# Allegro board gate_driver_ttype_modified_v1_11mar.brd
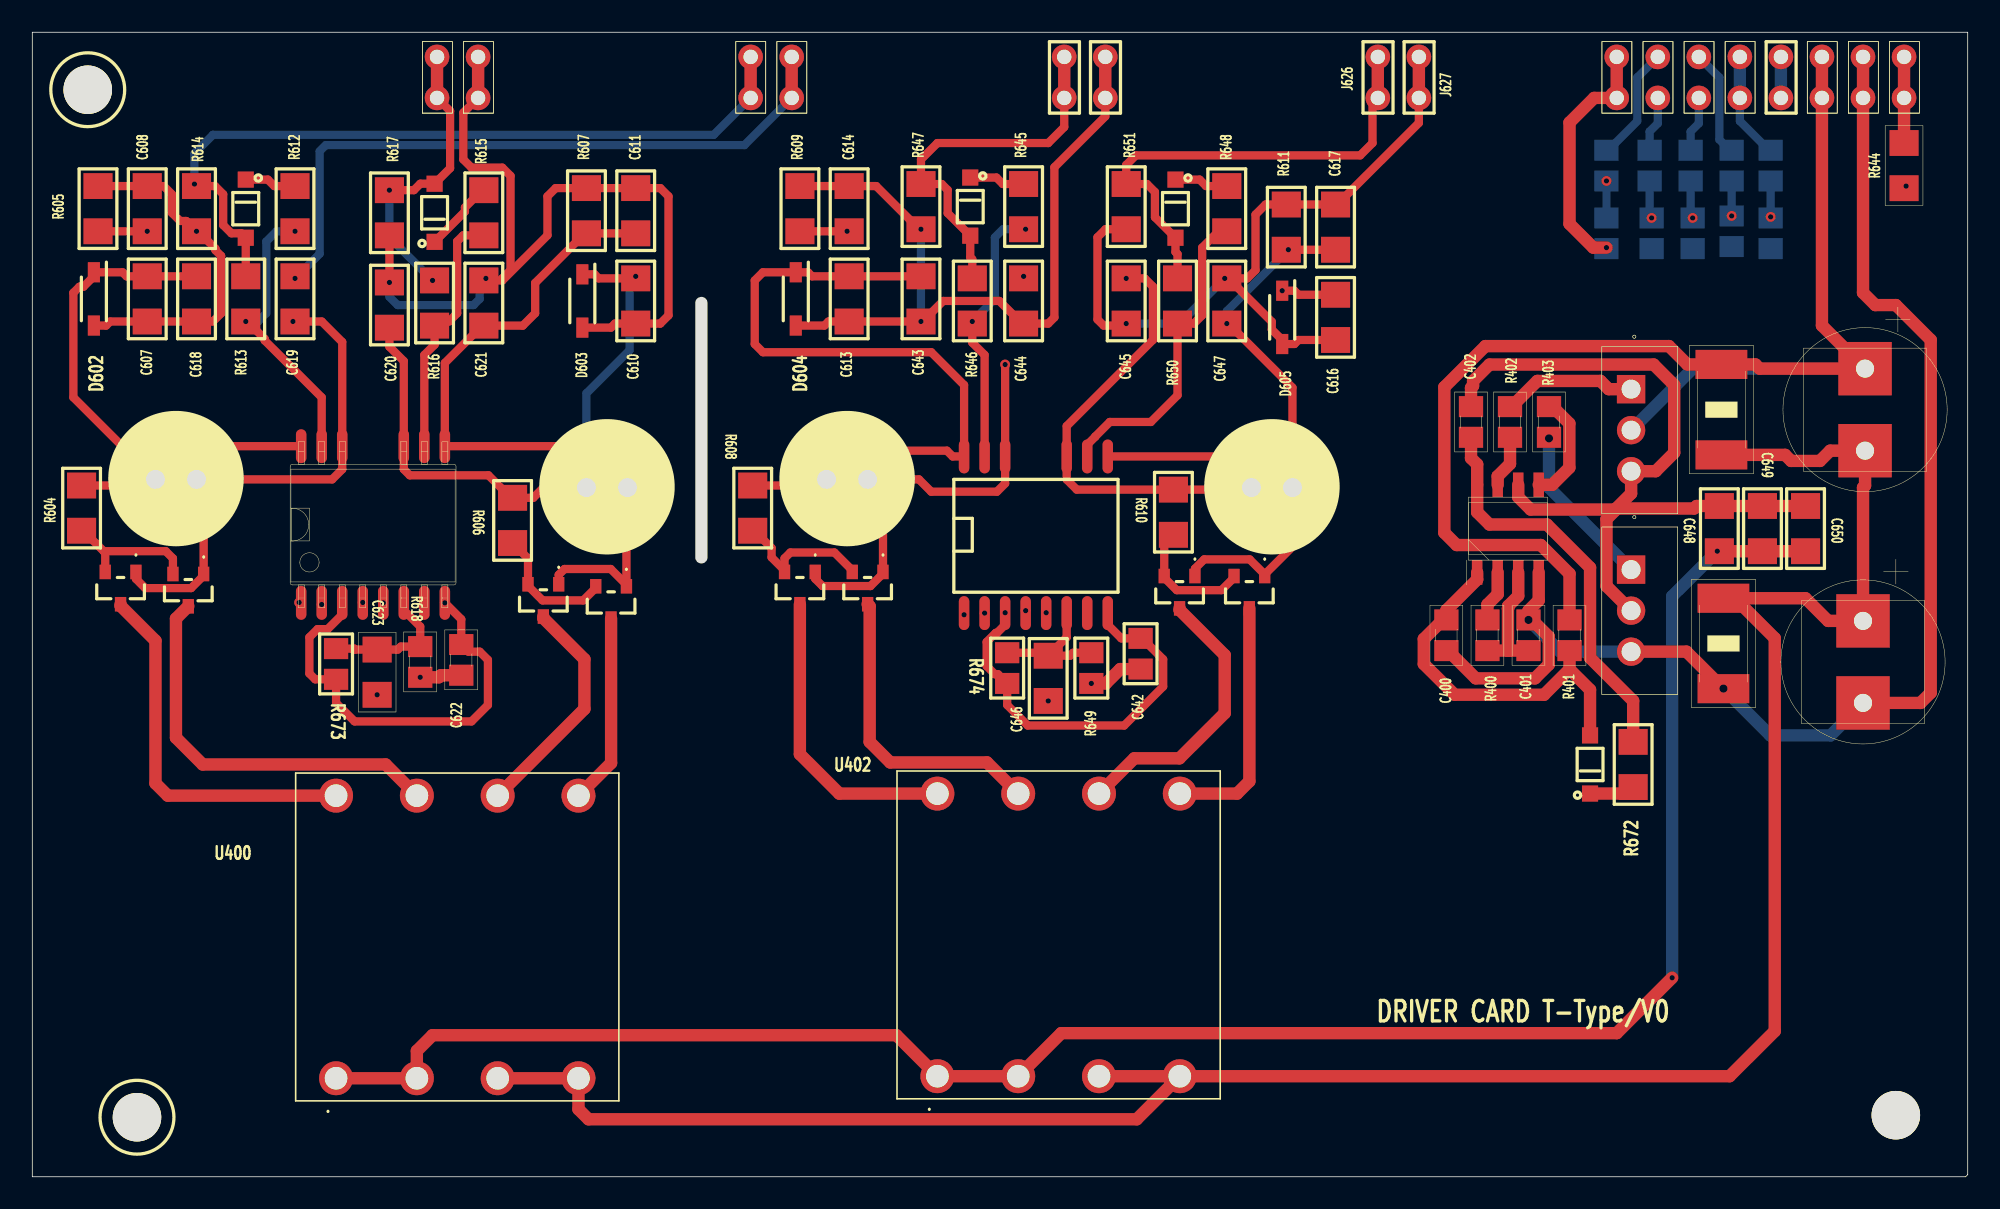
[diagram p0: board, top side]
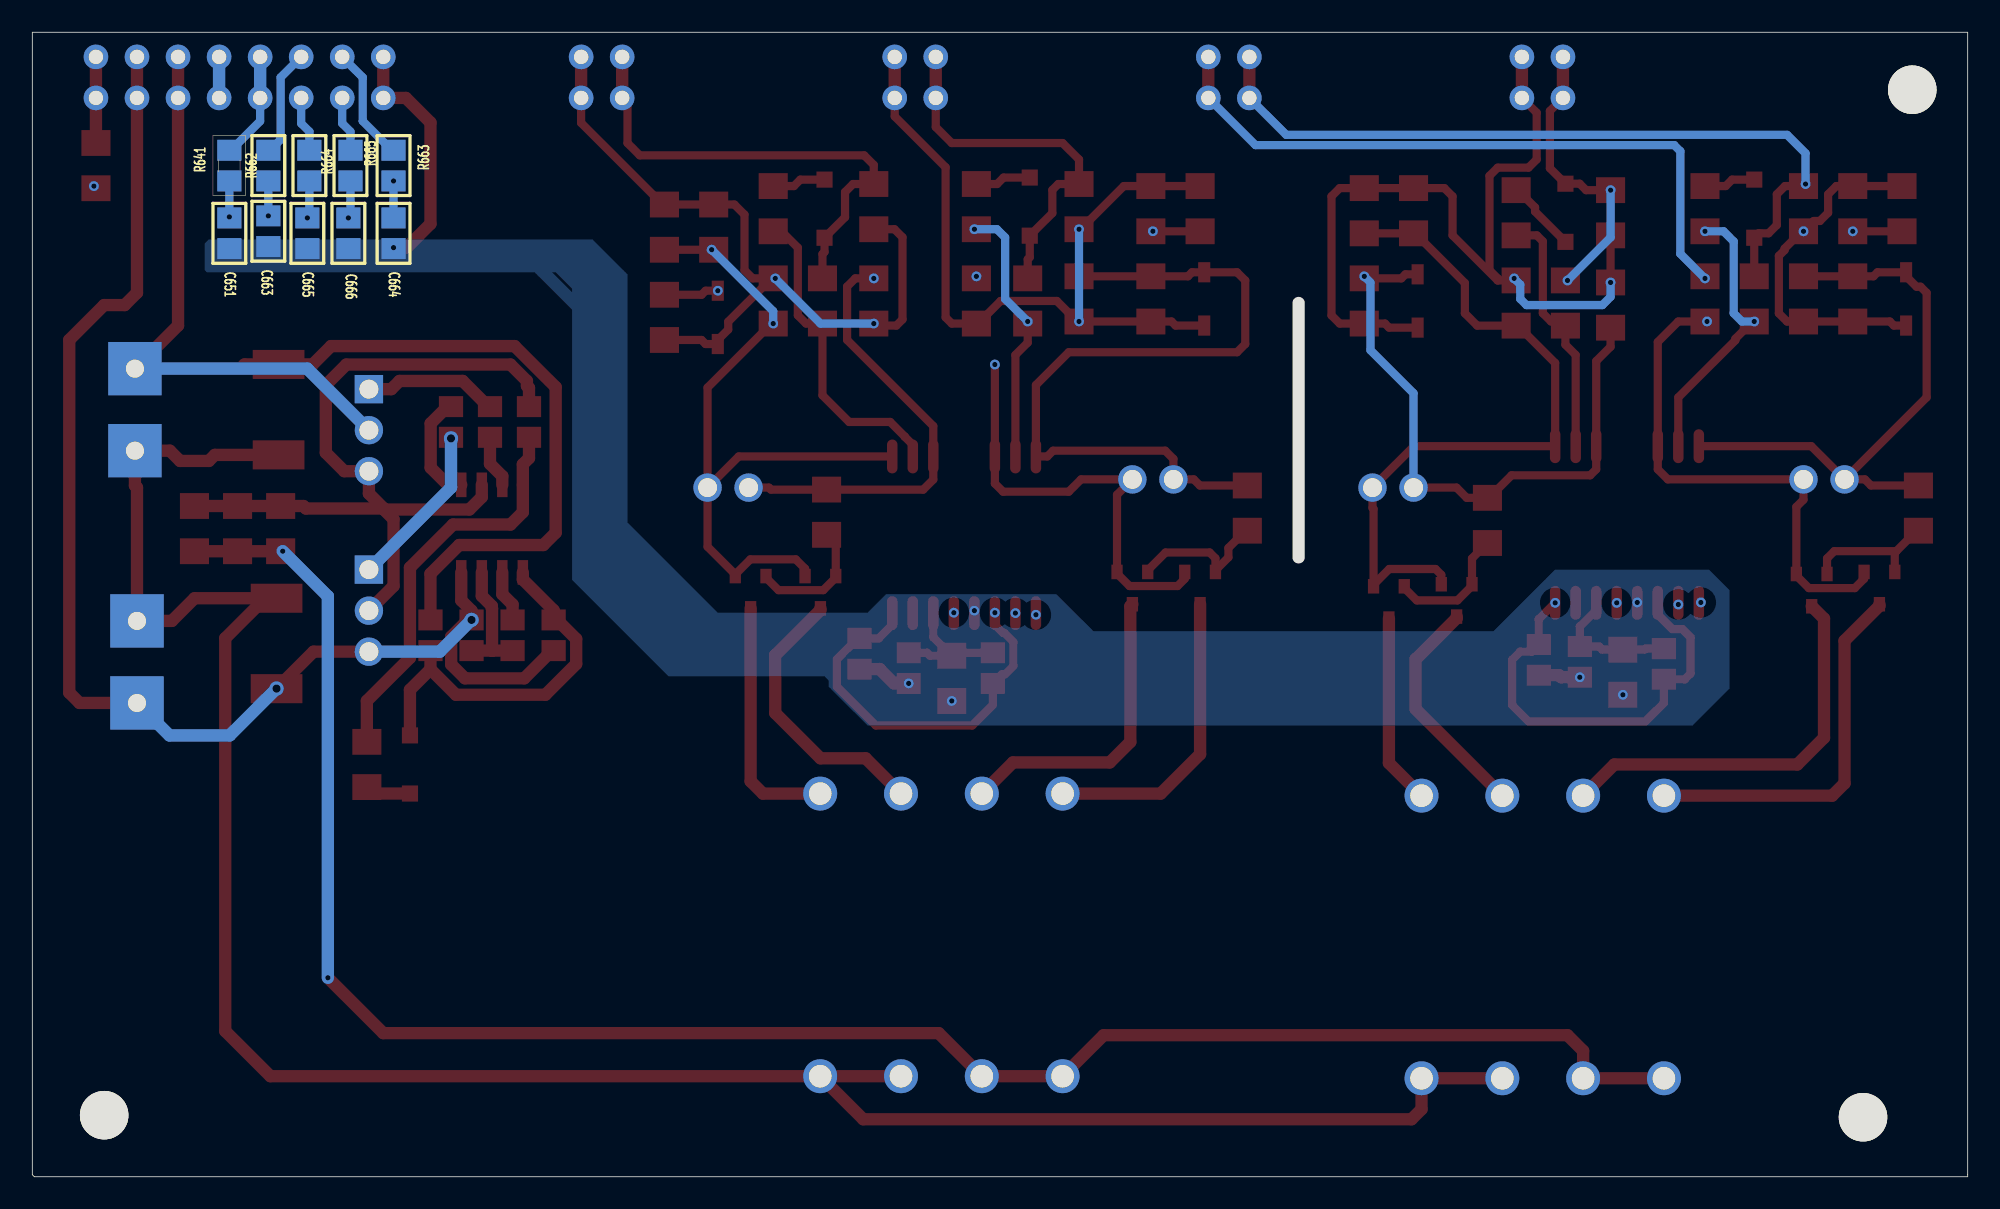
[diagram p1: board, bottom side, seen from below]

Outline 119.76 x 70.87 mm; copper layers: TOP, LAYER_1, LAYER_2, BOTTOM. Coordinates in mm from the lower left corner of the outline.
Outline path: 41.4,38.35 41.4,54.1 ; 0,70.87 0,0 119.63,0 119.76,0.13 119.76,70.87 0,70.87

## Design rules (mm)
constraint set DEFAULT: min track width 0.127

## Placement (name value [footprint] x y rotation side)
C400  0.1u 0805 50V  [SNPD0805_MODIFIED]  87.5 33.53 270 top
C401  10nF 0805 50V  [SNPD0805_MODIFIED]  92.58 33.53 90 top
C402  0.1u 0805 50V  [SNPD0805_MODIFIED]  89.03 46.74 90 top
C404  470u 35/50V  [CAP_SMD_PTH_470UF50V]  113.41 50.04 270 top
C405  470u 35/50V  [CAP_SMD_PTH_470UF50V]  113.28 34.42 270 top
C606  100 uF electrolytic  [220UF_35V]  7.62 43.18 0 top
C607  10u 1206 50V  [SNPD1206_MODIFIED]  7.11 54.36 90 top
C608  10u 1206 50V  [SNPD1206_MODIFIED]  7.11 59.94 90 top
C609  100 uF electrolytic  [220UF_35V]  34.29 42.67 0 top
C610  10u 1206 50V  [SNPD1206_MODIFIED]  37.34 54.23 90 top
C611  10u 1206 50V  [SNPD1206_MODIFIED]  37.34 59.82 90 top
C612  100 uF electrolytic  [220UF_35V]  49.15 43.18 0 top
C613  10u 1206 50V  [SNPD1206_MODIFIED]  50.55 54.36 90 top
C614  10u 1206 50V  [SNPD1206_MODIFIED]  50.55 59.94 90 top
C615  100 uF electrolytic  [220UF_35V]  75.44 42.67 0 top
C616  22u 1206 50V  [SNPD1206_MODIFIED]  80.64 53.21 90 top
C617  22u 1206 50V  [SNPD1206_MODIFIED]  80.64 58.8 90 top
C618  0.1u 1206 50V  [SNPD1206_MODIFIED]  10.16 54.36 270 top
C619  0.1u 1206 50V  [SNPD1206_MODIFIED]  16.26 54.36 270 top
C620  0.1u 1206 50V  [SNPD1206_MODIFIED]  22.1 53.97 90 top
C621  0.1u 1206 50V  [SNPD1206_MODIFIED]  27.94 54.1 270 top
C622  0.1u 0805 50V  [SNPD0805_MODIFIED]  26.54 32 270 top
C623  2.2nF 1206 50V  [SNPD1206_MODIFIED]  21.34 31.24 90 top
C642  0.1u 0805 50V  [SNPD0805_MODIFIED]  68.58 32.38 270 top
C643  0.1u 1206 50V  [SNPD1206_MODIFIED]  54.99 54.36 270 top
C644  0.1u 1206 50V  [SNPD1206_MODIFIED]  61.34 54.23 90 top
C645  0.1u 1206 50V  [SNPD1206_MODIFIED]  67.69 54.23 270 top
C646  2.2nF 1206 50V  [SNPD1206_MODIFIED]  62.86 30.86 90 top
C647  0.1u 1206 50V  [SNPD1206_MODIFIED]  73.91 54.23 270 top
C648  1u 1206 50V  [SNPD1206_MODIFIED]  104.39 40.13 270 top
C649  1u 1206 50V  [SNPD1206_MODIFIED]  107.06 40.13 270 top
C650  1u 1206 50V  [SNPD1206_MODIFIED]  109.73 40.13 270 top
C651  0.1u 0805 50V  [SNPD0805_MODIFIED]  107.57 58.42 270 bottom
C663  0.1u 0805 50V  [SNPD0805_MODIFIED]  105.16 58.55 270 bottom
C664  0.1u 0805 50V  [SNPD0805_MODIFIED]  97.41 58.42 270 bottom
C665  0.1u 0805 50V  [SNPD0805_MODIFIED]  102.74 58.42 270 bottom
C666  0.1u 0805 50V  [SNPD0805_MODIFIED]  100.2 58.42 270 bottom
D408  -  [BAV99]  35.81 35.56 180 top
D409  -  [BAV99]  31.62 35.69 180 top
D602  BZT52B12-E3-18_SOD123_2.4V  [SOD3716X135N]  3.81 54.36 270 top
D603  BZT52B12-E3-18_SOD123_2.4V  [SOD3716X135N]  34.04 54.23 270 top
D604  BZT52B12-E3-18_SOD123_2.4V  [SOD3716X135N]  47.24 54.36 270 top
D605  BZT52B12-E3-18_SOD123_2.4V  [SOD3716X135N]  77.34 53.21 270 top
D606  1N4148 SMD  [DO214]  13.21 59.94 270 top
D607  1N4148 SMD  [DO214]  24.89 59.69 90 top
D614  1N4148 SMD  [DO214]  58.04 60.07 270 top
D615  1N4148 SMD  [DO214]  70.74 59.94 270 top
D616  -  [BAV99]  9.65 36.32 180 top
D617  -  [BAV99]  5.46 36.45 180 top
D618  -  [BAV99]  75.31 36.2 180 top
D619  -  [BAV99]  70.99 36.2 180 top
D620  -  [BAV99]  51.69 36.45 180 top
D621  -  [BAV99]  47.5 36.45 180 top
D624  1N4148 SMD  [DO214]  96.39 25.53 90 top
IC400  IR21531SPBF  [SOIC127P600X175-8N]  91.31 40.13 90 top
J600  CON2  [SIP_2PIN_BERGSTRIP]  44.45 69.34 0 top
J601  CON2  [SIP_2PIN_BERGSTRIP]  46.99 69.34 0 top
J602  CON2  [SIP_2PIN_BERGSTRIP]  25.04 69.34 0 top
J603  CON2  [SIP_2PIN_BERGSTRIP]  27.58 69.34 0 top
J617  CON2  [SIP_2PIN_BERGSTRIP]  105.66 69.34 0 top
J618  CON2  [SIP_2PIN_BERGSTRIP]  98.04 69.34 0 top
J619  CON2  [SIP_2PIN_BERGSTRIP]  115.82 69.34 0 top
J622  CON2  [SIP_2PIN_BERGSTRIP]  110.74 69.34 0 top
J623  CON2  [SIP_2PIN_BERGSTRIP]  113.28 69.34 0 top
J624  CON2  [SIP_2PIN_BERGSTRIP]  63.86 69.34 0 top
J625  CON2  [SIP_2PIN_BERGSTRIP]  66.4 69.34 0 top
J626  CON2  [SIP_2PIN_BERGSTRIP]  83.26 69.34 0 top
J627  CON2  [SIP_2PIN_BERGSTRIP]  85.8 69.34 0 top
J629  CON2  [SIP_2PIN_BERGSTRIP]  108.2 69.34 0 top
NOREF  -  [unnamed]  3.43 67.31 0 top
NOREF#2  -  [unnamed]  6.48 3.68 0 top
NOREF#3  -  [unnamed]  115.32 3.81 0 top
Q400  CSD19531KCS  [TO254P1036X470X1965-3]  98.93 46.23 270 top
Q401  CSD19531KCS  [TO254P1036X470X1965-3]  98.93 35.05 270 top
R400  1K 0805 5%  [SNPD0805_MODIFIED]  90.04 33.53 90 top
R401  47E 0805 5%  [SNPD0805_MODIFIED]  95.12 33.53 270 top
R402  10E 0805 5%  [SNPD0805_MODIFIED]  91.44 46.74 90 top
R403  10E 0805 5%  [SNPD0805_MODIFIED]  93.85 46.74 270 top
R404  470E 2512  [SNPD2512_MODIFIED]  104.52 47.5 270 top
R405  470E 2512  [SNPD2512_MODIFIED]  104.65 33.02 270 top
R604  10E 1206 5%  [SNPD1206_MODIFIED]  3.05 41.4 270 top
R605  510E || 510E 1206 5%  [SNPD1206_MODIFIED]  4.06 59.94 90 top
R606  10E 1206 5%  [SNPD1206_MODIFIED]  29.72 40.64 270 top
R607  510E || 510E 1206 5%  [SNPD1206_MODIFIED]  34.29 59.82 90 top
R608  10E 1206 5%  [SNPD1206_MODIFIED]  44.58 41.4 270 top
R609  510E || 510E 1206 5%  [SNPD1206_MODIFIED]  47.5 59.94 90 top
R610  10E 1206 5%  [SNPD1206_MODIFIED]  70.61 41.15 270 top
R611  510E || 510E 1206 5%  [SNPD1206_MODIFIED]  77.6 58.8 90 top
R612  2.2E 1206 5%  [SNPD1206_MODIFIED]  16.26 59.94 90 top
R613  4.7E 1206 5%  [SNPD1206_MODIFIED]  13.21 54.36 90 top
R614  10K 1206 1%  [SNPD1206_MODIFIED]  10.16 59.94 90 top
R615  2.2E 1206 5%  [SNPD1206_MODIFIED]  27.94 59.69 90 top
R616  4.7E 1206 5%  [SNPD1206_MODIFIED]  24.89 54.1 90 top
R617  10K 1206 1%  [SNPD1206_MODIFIED]  22.1 59.69 90 top
R618  10K 0805 1%  [SNPD0805_MODIFIED]  24 31.88 90 top
R641  10E 0805 1%  [SNPD0805_MODIFIED]  107.57 62.61 90 bottom
R644  10E 1206 5%  [SNPD1206_MODIFIED]  115.82 62.61 270 top
R645  2.2E 1206 5%  [SNPD1206_MODIFIED]  61.34 60.07 90 top
R646  4.7E 1206 5%  [SNPD1206_MODIFIED]  58.17 54.23 90 top
R647  10K 1206 1%  [SNPD1206_MODIFIED]  54.99 60.07 90 top
R648  2.2E 1206 5%  [SNPD1206_MODIFIED]  73.91 59.94 90 top
R649  10K 0805 1%  [SNPD0805_MODIFIED]  65.53 31.5 90 top
R650  4.7E 1206 5%  [SNPD1206_MODIFIED]  70.87 54.23 90 top
R651  10K 1206 1%  [SNPD1206_MODIFIED]  67.69 60.07 90 top
R662  10E 0805 1%  [SNPD0805_MODIFIED]  105.16 62.61 90 bottom
R663  10E 0805 1%  [SNPD0805_MODIFIED]  97.41 62.61 90 bottom
R664  10E 0805 1%  [SNPD0805_MODIFIED]  102.62 62.61 90 bottom
R665  10E 0805 1%  [SNPD0805_MODIFIED]  100.08 62.61 90 bottom
R672  12E 1206 5%  [SNPD1206_MODIFIED]  99.06 25.53 90 top
R673  10K 0805 1%  [SNPD0805_MODIFIED]  18.8 31.75 270 top
R674  10K 0805 1%  [SNPD0805_MODIFIED]  60.32 31.5 270 top
T602  CON2  [SIP_2PIN_BERGSTRIP]  103.12 69.34 0 top
T603  CON2  [SIP_2PIN_BERGSTRIP]  100.58 69.34 0 top
U400  EFD20/10/7  [B66418W1008D1]  18.8 6.1 0 top
U402  EFD20/10/7  [B66418W1008D1]  56.01 6.22 0 top
U600  UCC21520DW SOIC16  [UCC21520]  21.08 40.39 90 top
U604  UCC21520DW SOIC16  [UCC21520]  62.1 39.75 90 top

## Library data of the parts
C400-C402 = CAP NP: room: driver_supply
C404 C405 = CAP: room: driver_supply
C606 C609 C612 C615 = CAP: room: driver
C607 C608 C610 C611 C613 C614 C616-C623 C642-C651 C663-C666 = CAP NP: room: driver
D408 D409 D616-D621 = BAV99: room: driver_supply
D602-D605 = DIODE ZENER: room: driver
D606 D607 D614 D615 D624 = DIODE: room: driver
IC400 = IR21531SPBF: room: driver_supply
J600-J603 J617-J619 J622-J627 J629 T602 T603 = CON2: room: driver
Q400 Q401 = CSD19531KCS: room: driver_supply
R400-R405 = RESISTOR: room: driver_supply
R604-R618 R641 R644-R651 R662-R665 R672-R674 = RESISTOR: room: driver
U400 U402 = B66418W1008D1
U600 U604 = UCC21520ADWR_2: room: driver

## Footprints (pads in the part's own frame, mm; a bottom-side part is the same pattern mirrored in y, then rotated)
220UF_35V
  round 1.755 hole 1.17: 1(0,0) 2(2.54,0)
B66418W1008D1
  round 2.1 hole 1.4: 1(0,0) 2(5,0) 3(10,0) 4(15,0) 5(15,17.5) 6(10,17.5) 7(5,17.5) 8(0,17.5)
BAV99
  rect 0.7x0.9 smd: 1(-0.95,-1) 2(0.95,-1) 3(0,1)
CAP_SMD_PTH_470UF50V
  rect 3.302x3.302 hole 1.118: 1(0,0) 2(5.08,0)
DO214
  rect 1x1 smd: 1(-1.8,0) 2(1.8,0)
SIP_2PIN_BERGSTRIP
  round 1.524 hole 0.889: 1(0,0) 2(0,-2.54)
SNPD0805_MODIFIED
  rect 1.3x1.5 smd: 1(-0.95,0) 2(0.95,0)
SNPD1206_MODIFIED
  rect 1.6x1.8 smd: 1(-1.4,0) 2(1.4,0)
SNPD2512_MODIFIED
  rect 1.8x3.2 smd: 1(-2.8,0) 2(2.8,0)
SOD3716X135N
  rect 1.25x0.75 smd: 1(-1.65,0) 2(1.65,0)
SOIC127P600X175-8N
  rect 1.525x0.65 smd: 1(-2.712,1.905) 2(-2.712,0.635) 3(-2.712,-0.635) 4(-2.712,-1.905) 5(2.712,-1.905) 6(2.712,-0.635) 7(2.712,0.635) 8(2.712,1.905)
TO254P1036X470X1965-3
  rect 1.755x1.755 hole 1.17: 1(-2.54,0)
  round 1.755 hole 1.17: 2(0,0) 3(2.54,0)
UCC21520
  oval 2.1x0.65 smd: 1(-4.85,4.445) 2(-4.85,3.175) 3(-4.85,1.905) 4(-4.85,0.635) 5(-4.85,-0.635) 6(-4.85,-1.905) 7(-4.85,-3.175) 8(-4.85,-4.445) 9(4.85,-4.445) 10(4.85,-3.175) 11(4.85,-1.905) 14(4.85,1.905) 15(4.85,3.175) 16(4.85,4.445)
unnamed
  round 3 hole 4 unplated: (0,0)

## Nets
5VCC: J619.1 J619.2 R644.1
5VCC1: C622.1 C642.1 R644.2 R673.2 R674.2 U600.3 U600.8 U604.3 U604.8
15VPWR3: C606.1 C607.2 C618.1 D602.1(CATHODE) R604.1 U600.16
15VPWR4: C609.1 C610.2 C620.1 D603.1(CATHODE) R606.1 U600.11
15VPWR5: C612.1 C613.2 C643.1 D604.1(CATHODE) R608.1 U604.16
15VPWR6: C615.1 C616.2 C645.1 D605.1(CATHODE) R610.1 U604.11
22VPWR2: C404.1 J622.1 J622.2 Q400.2 R401.1 R404.1
22VPWR3: D616.2(K) D617.2(K) R604.2
22VPWR4: D408.2(K) D409.2(K) R606.2
22VPWR5: D620.2(K) D621.2(K) R608.2
22VPWR6: D618.2(K) D619.2(K) R610.2
-7VPWR3: C606.2 C608.1 C619.2 D616.1 D617.1 R605.1 U600.14
-7VPWR4: C609.2 C611.1 C621.2 D408.1 D409.1 R607.1 U600.9(VSSB)
-7VPWR5: C612.2 C614.1 C644.2 D620.1 D621.1 R609.1 U604.14
-7VPWR6: C615.2 C617.1 C647.2 D618.1 D619.1 R611.1 U604.9(VSSB)
GND22VPWR2: C400.2 C401.2 C405.2 IC400.4 J623.1 J623.2 Q401.3(S) R405.2
GNDPWR3: C607.1 C608.2 C618.2 C619.1 D602.2 J601.1 J601.2 R605.2 R614.1
GNDPWR4: C610.1 C611.2 C620.2 C621.1 D603.2 J603.1 J603.2 R607.2 R617.1
GNDPWR5: C613.1 C614.2 C643.2 C644.1 D604.2 J625.1 J625.2 R609.2 R647.1
GNDPWR6: C616.1 C617.2 C645.2 C647.1 D605.2 J627.1 J627.2 R611.2 R651.1
0: C622.2 C623.1 C642.2 C646.1 C651.2 C663.2 C664.2 C665.2 C666.2 J618.1 J618.2 R618.1 R649.1 U600.4 U604.4
DIS2PWM: J617.1 J617.2 R641.2
DIS2PWM_IC: C651.1 R641.1 U600.5 U604.5
EPWM1A: R662.2 T602.1
EPWM1A_IC: C663.1 R662.1 U600.1
EPWM1B: R663.2 T603.1
EPWM1B_IC: C664.1 R663.1 U600.2
EPWM2A: R664.2 T602.2
EPWM2A_IC: C665.1 R664.1 U604.1
EPWM2B: R665.2 T603.2
EPWM2B_IC: C666.1 R665.1 U604.2
G1: D606.2 J600.1 J600.2 R613.2 R614.2
G2: D607.2 J602.1 J602.2 R616.2 R617.2
G3: D614.2 J624.1 J624.2 R646.2 R647.2
G4: D615.2 J626.1 J626.2 R650.2 R651.2
N16604726: R612.1 R613.1 U600.15
N16604734: D606.1(K) R612.2
N16605328: R615.1 R616.1 U600.10
N16605336: D607.1(K) R615.2
N16605348: C623.2 R618.2 R673.1 U600.6
N16611223: C400.1 D624.2 IC400.1 R401.2
N16611259: C402.1 IC400.8 R672.2
N16611337: IC400.7 R402.1
N16611345: Q400.1 R402.2
N16611381: IC400.2 R400.2
N16611397: C404.2 C405.1 R404.2 R405.1 U400.3 U400.4 U402.3 U402.4
N16611401: C401.1 IC400.3 R400.1
N16611409: C402.2 C648.1 C649.1 C650.1 IC400.6(VS) Q400.3(S) Q401.2
N16611461: Q401.1 R403.2
N16611541: C648.2 C649.2 C650.2 U400.1 U400.2 U402.1 U402.2
N16611845: D408.3 U400.5
N16611853: D409.3 U400.6
N16611873: D618.3 U402.5
N16611909: D616.3 U400.7
N16611913: D617.3 U400.8
N16611921: D619.3 U402.6
N16611937: D621.3 U402.8
N16611945: D620.3 U402.7
N16653062: R645.1 R646.1 U604.15
N16653070: D614.1(K) R645.2
N16653416: R648.1 R650.1 U604.10
N16653424: D615.1(K) R648.2
N16653436: C646.2 R649.2 R674.1 U604.6
N16708258: D624.1(K) R672.1
N16708612: IC400.5 R403.1
N16729979: J629.1 J629.2

Pads without a net: U600 7; U604 7

## Via types
v1: diameter 0.61, hole 0.33, TOP to BOTTOM, 48 vias
v2: diameter 0.889, hole 0.508, TOP to BOTTOM, 3 vias

## Routing (per net, layer and track width the routed paths; a pad name or vN(x,y) marks a point on that pad's centre or on a via; arc(x,y) is an arc through that point)
5VCC: length 5.3
  TOP w0.762: R644.1 J619.2 J619.1
5VCC1: length 165.5
  TOP w0.508: U600.3 19.18,34.81 18.27,33.91 17.65,33.91 17.14,33.4 17.14,31.16 17.5,30.8 R673.2 18.8,29.34 19.94,28.19 27.18,28.19 28.19,29.21 28.19,32 27.69,32.51 26.98,32.51 C622.1 26.54,34.52 v1(25.53,35.54) ; U604.3 60.2,34.18 59.7,33.68 59.62,33.68 59.05,33.11 59.05,31.62 59.56,31.12 59.76,31.12 R674.2 60.32,29.21 61.59,27.94 67.56,27.94 69.98,30.35 69.98,32.04 68.68,33.33 C642.1 67.39,33.33 66.55,34.18 U604.8
  LAYER_1 w0.762: 60.2,33.91 60.96,33.15 78.61,33.15 84.96,39.5 84.96,54.86 88.52,58.42 113.03,58.42 v1(115.95,61.34) ; 60.2,33.91 v1(60.2,34.92) ; 60.2,33.91 59.44,33.15 27.92,33.15 v1(25.53,35.54)
15VPWR3: length 36.7
  TOP w0.508: C606.1 2.54,48.26 2.54,54.74 2.92,55.11 3.17,55.11 3.81,55.76 D602.1 5.58,56.01 5.83,55.76 C607.2 C618.1 ; C606.1 6.36,43.18 5.98,42.8 R604.1 ; C606.1 9.68,45.24 U600.16
15VPWR4: length 39.2
  TOP w0.508: D603.1 34.79,55.88 35.04,55.63 C610.2 ; C609.1 31.63,42.67 31,42.04 R606.1 29.62,42.04 28.22,43.43 23.36,43.43 22.99,43.8 U600.11 22.99,50.5 22.1,51.39 C620.1
  BOTTOM w0.508: v1(37.34,55.75) 36.96,55.37 36.96,51.18 34.29,48.51 C609.1
15VPWR5: length 47.8
  TOP w0.508: C643.1 C613.2 48.25,55.76 48,56.01 D604.1 45.21,56.01 44.7,55.5 44.7,51.56 45.21,51.05 55.63,51.05 57.66,49.02 U604.16 56.95,44.6 56.59,44.96 49.66,44.96 49.15,44.45 C612.1 47.89,43.18 47.51,42.8 R608.1
15VPWR6: length 41.8
  TOP w0.508: C645.1 68.83,55.63 69.34,55.12 69.34,51.82 64.01,46.48 U604.11 64.01,43.17 64.63,42.55 R610.1 74.06,42.55 74.18,42.67 C615.1 ; v1(77.34,54.86) 78.1,54.86 78.35,54.61 C616.2
  LAYER_1 w0.508: v1(77.34,54.86) 76.58,54.1 69.22,54.1 v1(67.69,55.63)
22VPWR2: length 84.8
  TOP w0.762: R401.1 95.12,37.34 93.34,39.12 88.14,39.12 87.38,39.88 87.38,48.89 89.92,51.44 101.28,51.44 102.41,50.3 R404.1 106.63,50.3 106.89,50.04 C404.1 110.74,52.7 J622.2 J622.1
  BOTTOM w0.762: Q400.2 102.74,50.04 C404.1
22VPWR3: length 8.7
  TOP w0.508: D616.2 8.7,38.29 8.25,38.73 4.42,38.73 ; 4.42,38.73 4.51,38.64 D617.2 ; 4.42,38.73 3.15,40 R604.2
22VPWR4: length 8
  TOP w0.508: R606.2 30.67,38.28 D409.2 30.67,36.59 31.57,35.69 34.09,35.69 34.86,36.46 D408.2
22VPWR5: length 9.1
  TOP w0.508: D620.2 50.74,37.55 49.64,38.65 46.91,38.65 46.55,38.29 46.55,37.55 ; D621.2 46.55,37.55 ; 46.55,37.55 45.75,38.35 45.75,38.93 44.68,40 R608.2
22VPWR6: length 7.9
  TOP w0.508: D618.2 74.36,37.09 73.59,36.32 70.82,36.32 70.04,37.09 D619.2 70.04,39.18 R610.2
-7VPWR3: length 49.1
  TOP w0.508: C619.2 17.91,52.96 19.18,51.69 U600.14 19.18,43.8 18.55,43.18 C606.2 10.16,41.92 10.6,41.48 D616.1 10.6,37.22 9.83,36.45 6.98,36.45 6.41,37.02 D617.1 ; v1(7.11,58.54) R605.1
  LAYER_1 w0.508: v1(7.11,58.54) 7.11,54.99 7.49,54.61 15.75,54.61 16.13,54.23 v1(16.13,52.96)
-7VPWR4: length 45.2
  TOP w0.508: C611.1 R607.1 34.19,58.42 31.11,55.34 31.11,53.47 30.35,52.7 C621.2 27.84,52.7 25.53,50.39 U600.9 34.27,45.24 C609.2 36.83,41.41 36.76,41.35 36.76,36.66 ; 36.76,36.66 D408.1 ; 36.76,36.66 35.79,37.63 32.93,37.63 32.57,37.27 D409.1
-7VPWR5: length 49.9
  TOP w0.508: v1(60.2,50.29) U604.14 60.2,42.93 59.69,42.42 55.63,42.42 54.86,43.18 C612.2 52.64,42.23 D620.1 52.64,37.35 51.87,36.58 48.89,36.58 48.45,37.02 D621.1 ; R609.1 C614.1
  LAYER_1 w0.508: v1(60.2,50.29) 60.2,54.61 v1(61.34,55.75) 61.34,56.52 60.96,56.9 51.05,56.9 50.8,57.15 50.8,58.17 v1(50.42,58.55)
-7VPWR6: length 44.9
  TOP w0.508: C615.2 76.05,44.6 U604.9 ; C615.2 77.98,48.87 74.01,52.83 v1(73.91,52.83) ; C615.2 77.98,39.01 76.26,37.3 ; 76.26,37.3 D618.1 ; 76.26,37.3 75.33,38.23 72.52,38.23 71.94,37.65 D619.1 ; C617.1 R611.1
  BOTTOM w0.508: v1(77.72,57.4) 73.91,53.59 v1(73.91,52.83)
GND22VPWR2: length 84.8
  TOP w0.762: v2(104.65,30.23) 102.36,32.51 98.93,32.51 ; C400.2 87.6,32.58 89.32,30.86 92.98,30.86 93.84,31.72 93.84,33.44 92.8,34.48 v2(92.58,34.48) 92.58,35.05 93.22,35.69 IC400.4 ; C405.2 116.84,29.34 117.47,29.97 117.47,51.82 115.32,53.97 114.05,53.97 113.28,54.74 J623.2 J623.1
  BOTTOM w0.762: v2(104.65,30.23) 107.55,27.33 111.27,27.33 C405.2 ; 98.93,32.51 94.55,32.51 v2(92.58,34.48)
GNDPWR3: length 70.8
  TOP w0.508: D602.2 4.57,52.71 4.82,52.96 C607.1 C618.2 11.18,52.96 11.68,53.46 11.68,57.02 11.33,57.37 11.33,57.47 10.26,58.54 v1(10.16,58.54) 9.52,59.18 9.14,59.18 8.64,59.69 8.64,60.84 8.13,61.34 C608.2 R605.2
  TOP w0.762: J601.1 J601.2
  LAYER_1 w0.508: v1(10.16,58.54) 13.34,58.54 v1(16.26,55.63)
  BOTTOM w0.508: v1(16.26,55.63) 17.78,57.15 17.78,63.5 18.16,63.88 44.07,63.88 J601.2
GNDPWR4: length 56.4
  TOP w0.508: D603.2 35.81,52.58 36.06,52.83 C610.1 38.86,52.83 39.37,53.34 39.37,60.71 38.86,61.22 C611.2 R607.2 32.38,61.22 31.88,60.71 31.88,58.29 29.09,55.5 ; 29.09,55.5 C621.1 ; 29.09,55.5 29.09,55.63 29.59,56.13 29.59,61.98 29.08,62.48 27.18,62.48 26.67,62.99 26.67,65.89 J603.2 ; R617.1 v1(22.1,55.38)
  TOP w0.762: J603.1 J603.2
  BOTTOM w0.508: v1(22.1,55.38) 22.1,54.48 22.61,53.97 27.3,53.97 27.69,54.36 27.69,55.24 v1(28.07,55.63)
GNDPWR5: length 49.1
  TOP w0.508: J625.2 66.4,65.66 63.25,62.51 63.25,53.21 62.86,52.83 C644.1 61.24,52.83 59.84,54.23 56.36,54.23 55.09,52.96 C643.2 C613.1 49.26,52.96 49.01,52.71 D604.2 ; R609.2 C614.2 52.22,61.34 54.89,58.67 v1(54.99,58.67)
  TOP w0.762: J625.1 J625.2
  BOTTOM w0.508: v1(54.99,58.67) v1(54.99,52.96)
GNDPWR6: length 47.1
  TOP w0.508: 74.01,55.63 75.18,55.63 75.69,56.14 75.69,59.58 76.32,60.2 R611.2 C617.2 80.75,60.2 85.8,65.26 J627.2 ; 74.01,55.63 76.7,52.94 76.7,52.46 77.34,51.81 D605.2 78.1,51.56 78.35,51.81 C616.1 ; 74.01,55.63 C647.1 ; v1(67.69,52.83) 67.57,52.7 66.29,52.7 65.91,53.09 65.91,58.17 66.41,58.67 R651.1
  TOP w0.762: J627.1 J627.2
  BOTTOM w0.508: v1(73.79,55.63) 70.99,52.83 v1(67.69,52.83)
0: length 21.3
  TOP w0.762: J618.1 J618.2 96.65,66.8 95.12,65.28 95.12,59 96.6,57.53 v1(97.41,57.53) ; v1(65.53,30.55) 66.43,30.55 67.32,31.44 C642.2 ; v1(24,30.93) 25.16,30.93 25.28,31.05 C622.2
  vias: v1(20.45,35.56) v1(21.34,29.84) v1(61.47,35.05) v1(62.86,29.46)
DIS2PWM: length 6.6
  BOTTOM w0.508: R641.2 107.47,63.56 105.66,65.37 J617.2
  BOTTOM w0.762: J617.1 J617.2
DIS2PWM_IC: length 111.6
  LAYER_1 w0.508: 62.74,35.69 62.23,36.2 27.56,36.2 26.67,37.08 22.22,37.08 21.72,36.58 v1(21.72,35.54) ; 62.74,35.69 v1(62.74,34.92) ; 62.74,35.69 63.25,36.2 79.88,36.2 83.82,40.13 83.82,57.28 87.12,60.58 106.43,60.58 v1(107.57,59.44)
  BOTTOM w0.508: C651.1 v1(107.57,59.44) R641.1
EPWM1A: length 6.7
  BOTTOM w0.508: R662.2 105.06,63.56 104.39,64.22 104.39,68.07 T602.1
EPWM1A_IC: length 115.1
  LAYER_2 w0.508: v1(105.16,59.5) 102.81,57.15 98,57.15 97.69,56.85 97.12,56.85 96.82,57.15 87.25,57.15 85.85,55.75 85.85,38.47 79.89,32.51 17.02,32.51 16.51,33.02 v1(16.51,35.56)
  BOTTOM w0.508: R662.1 v1(105.16,59.5)
EPWM1B: length 7.2
  BOTTOM w0.508: 97.41,63.56 97.51,63.56 99.31,65.37 99.31,68.07 T603.1
EPWM1B_IC: length 105.3
  LAYER_2 w0.508: v1(17.91,35.43) 17.91,33.91 18.41,33.4 79.76,33.4 85.22,38.86 85.22,56.02 86.99,57.78 93.53,57.78 v1(97.41,61.66)
  BOTTOM w0.508: v1(97.41,61.66) C664.1
EPWM2A: length 3.5
  BOTTOM w0.508: R664.2 102.62,64.72 103.12,65.23 T602.2
EPWM2A_IC: length 73.7
  LAYER_2 w0.508: v1(57.66,34.8) 57.66,35.94 58.55,36.83 66.93,36.83 69.09,34.67 78.49,34.67 83.95,40.13 83.95,56.54 84.2,56.8 84.2,57.02 86.61,59.44 91.69,59.44 96.3,64.04 98.07,64.04 v1(102.74,59.37)
  BOTTOM w0.508: v1(102.74,59.37) 102.62,59.5 R664.1
EPWM2B: length 3.5
  BOTTOM w0.508: T603.2 100.58,65.23 100.08,64.72 R665.2
EPWM2B_IC: length 67.7
  LAYER_2 w0.508: v1(58.93,34.9) 59.79,34.04 79.12,34.04 84.58,39.5 84.58,56.28 86.72,58.42 92.33,58.42 96.52,62.61 98.17,62.61 100.2,60.58 v1(100.2,59.37)
  BOTTOM w0.508: R665.1 100.08,59.5 v1(100.2,59.37)
G1: length 48.2
  TOP w0.508: R614.2 11.3,61.34 11.81,60.84 11.81,58.93 12.32,58.42 12.93,58.42 D606.2 R613.2
  TOP w0.762: J600.1 J600.2
  BOTTOM w0.508: J600.2 42.16,64.52 11.18,64.52 10.03,63.37 v1(10.03,61.47)
G2: length 18.2
  TOP w0.508: v1(22.09,61.09) R617.2 23.61,61.09 24.01,61.49 D607.2 25.85,62.45 25.85,65.99 J602.2
  TOP w0.762: J602.1 J602.2
  BOTTOM w0.508: v1(22.09,61.09) 22.09,58.17 v1(24.77,55.5)
G3: length 23.5
  TOP w0.508: J624.2 63.86,65 62.86,64.01 56.01,64.01 54.99,62.99 R647.2 56.27,61.47 56.64,61.1 56.64,59.67 D614.2 58.04,56.94 58.17,56.81 R646.2
  TOP w0.762: J624.1 J624.2
G4: length 30.4
  TOP w0.508: R650.2 70.87,57.14 70.74,57.26 D615.2 69.47,59.41 69.47,60.97 68.97,61.47 R651.2 67.69,62.65 68.28,63.25 82.17,63.25 82.93,64.01 82.93,66.47 J626.2
  TOP w0.762: J626.1 J626.2
N16604726: length 17.7
  TOP w0.508: R613.1 13.31,52.96 14.38,51.89 14.38,51.79 17.91,48.26 U600.15
  BOTTOM w0.508: v1(16.26,58.54) 15.11,58.54 14.48,57.91 14.48,53.47 13.97,52.96 v1(13.21,52.96)
N16604734: length 3.2
  TOP w0.508: R612.2 14.97,61.34 14.57,61.74 D606.1
N16605328: length 15.7
  TOP w0.508: R615.1 26.66,58.29 26.29,57.92 26.29,53.47 25.78,52.96 25.15,52.96 R616.1 24.89,51.52 24.26,50.89 U600.10
N16605336: length 4.5
  TOP w0.508: R615.2 27.84,61.09 26.77,60.02 26.77,59.77 D607.1
N16605348: length 8.4
  TOP w0.508: U600.6 22.99,35.08 24,34.07 R618.2 22.8,32.83 22.62,32.64 C623.2 19.98,32.64 19.93,32.7 R673.1
N16611223: length 23.4
  TOP w0.762: 95.12,31.42 93.55,29.84 88.01,29.84 86.11,31.75 86.11,33.3 87.28,34.48 C400.1 87.5,35.08 89.41,36.98 IC400.1 ; 95.12,31.42 R401.2 ; 95.12,31.42 96.39,30.15 D624.2
N16611259: length 25.1
  TOP w0.762: C402.1 89.03,44.5 89.41,44.11 IC400.8 89.41,41.15 90.17,40.39 93.73,40.39 96.39,37.72 96.39,32.13 99.06,29.46 R672.2
N16611337: length 3.3
  TOP w0.762: IC400.7 90.68,43.38 91.44,44.14 R402.1
N16611345: length 8.4
  TOP w0.762: Q400.1 97.55,48.77 97.04,49.28 93.13,49.28 91.54,47.69 R402.2
N16611381: length 3.2
  TOP w0.762: R400.2 90.04,35.43 90.68,36.07 IC400.2
N16611397: length 145.4
  TOP w0.762: U402.4 68.34,3.56 34.42,3.56 33.8,4.18 U400.4 U400.3 ; U402.4 105.03,6.22 107.82,9.02 107.82,33.34 105.35,35.82 ; U402.4 U402.3 ; R405.1 105.35,35.82 ; 105.35,35.82 109.72,35.82 111.12,34.42 C405.1 113.28,42.67 113.41,42.8 C404.2 111.25,44.96 110.62,44.32 108.84,44.32 108.46,44.7 R404.2
N16611401: length 7.7
  TOP w0.762: IC400.3 91.95,35.96 91.32,35.34 91.32,35.19 91.31,35.18 91.31,32.56 ; 91.31,32.56 91.33,32.58 C401.1 ; 91.31,32.56 91.3,32.58 R400.1
N16611409: length 51.2
  TOP w0.762: 98.01,41.38 98.93,42.3 98.93,43.69 100.46,43.69 101.6,44.83 101.6,49.02 100.33,50.29 90.17,50.29 89.15,49.28 89.15,48.97 89.03,48.84 C402.2 ; 98.01,41.38 98.01,41.31 ; 98.01,41.38 102.83,41.38 102.99,41.53 C648.1 C649.1 C650.1 ; 98.01,41.31 97.41,40.72 97.41,36.58 Q401.2 ; 98.01,41.31 92.72,41.31 91.95,42.08 IC400.6
N16611461: length 10.2
  BOTTOM w0.762: Q401.1 93.85,42.67 v2(93.85,45.72)
N16611541: length 121.3
  TOP w0.762: U400.1 U400.2 23.8,7.79 24.77,8.76 53.47,8.76 U402.1 U402.2 63.67,8.89 98.04,8.89 v1(101.47,12.32) ; C650.2 C649.2 C648.2
  BOTTOM w0.762: v1(101.47,12.32) 101.47,35.94 v1(104.27,38.73)
N16611845: length 11.8
  TOP w0.762: U400.5 35.81,25.61 D408.3
N16611853: length 14.4
  TOP w0.762: D409.3 31.62,34.59 34.16,32.05 34.16,28.96 U400.6
N16611873: length 15.3
  TOP w0.762: U402.5 74.55,23.72 75.31,24.49 D618.3
N16611909: length 24.8
  TOP w0.762: U400.7 21.87,25.53 10.54,25.53 8.89,27.18 8.89,34.56 D616.3
N16611913: length 23.5
  TOP w0.762: D617.3 5.46,35.35 7.62,33.19 7.62,24.36 8.38,23.6 U400.8
N16611921: length 17.5
  TOP w0.762: U402.6 68.19,25.91 70.99,25.91 73.79,28.71 73.79,32.3 70.99,35.09 D619.3
N16611937: length 18.8
  TOP w0.762: U402.8 49.94,23.72 47.5,26.16 D621.3
N16611945: length 19.1
  TOP w0.762: U402.7 59.08,25.65 53.09,25.65 51.82,26.92 51.82,35.32 D620.3
N16653062: length 16.6
  TOP w0.508: U604.15 58.93,50.89 58.17,51.65 R646.1 ; R645.1 v1(61.46,58.67)
  BOTTOM w0.508: v1(58.17,52.96) 59.56,54.36 59.56,58.16 60.07,58.67 v1(61.46,58.67)
N16653070: length 3.5
  TOP w0.508: R645.2 60.06,61.47 59.66,61.87 D614.1
N16653416: length 19.9
  TOP w0.508: U604.10 65.28,45.33 65.78,45.83 65.78,45.84 66.67,46.74 69.22,46.74 70.87,48.39 R650.1 70.87,52.83 71.88,52.83 72.39,53.34 72.39,57.53 73.4,58.54 R648.1
N16653424: length 3.3
  TOP w0.508: D615.1 72.23,61.74 72.63,61.34 R648.2
N16653436: length 8.5
  TOP w0.508: R649.2 64.4,32.45 64.22,32.26 C646.2 ; C646.2 62.68,32.45 R674.1 ; C646.2 64.01,33.4 U604.6
N16708258: length 2.8
  TOP w0.762: D624.1 98.66,23.73 R672.1
N16708612: length 6.8
  TOP w0.762: IC400.5 94.05,42.84 95.11,43.9 95.11,46.65 94.07,47.69 R403.1
N16729979: length 2.5
  BOTTOM w0.762: J629.2 J629.1

## Copper pours and planes (outline as drawn; the poured copper is in the pictures)
0 on BOTTOM: 85.09,58.04 108.84,58.04 109.09,57.78 109.09,56.13 108.97,56.01 88.68,56.01 86.36,53.69 86.36,36.96 80.39,30.99 70.74,30.99 70.48,30.73 70.48,30.35 68.07,27.94 17.02,27.94 14.73,30.23 14.73,36.32 16,37.59 25.53,37.59 29.34,33.78 54.1,33.78 56.39,36.07 66.93,36.07 68.07,34.92 77.34,34.92 82.93,40.51 82.93,55.88 ; 1 cut-out

## Text on the board
Ref Des/Silkscreen Top: DRIVER CARD T-Type/V0
NCLEGEND-1-4: FIGURE | FINISHED_SIZE | 13.0 | 20.0 | 35.0 | 44.0 | 46.06 | 55.12 | 157.48 | DRILL CHART: TOP to BOTTOM | ALL UNITS ARE IN MILS | PLATED | NON-PLATED | QTY | 48 | 3 | 32 | 4 | 14 | 16
